# Altium PCB Galileo_Control_Board.PcbDoc
Units mm, origin at the board's own origin, x right, y up, seen from the top; angles counter-clockwise.
Board outline 46.6 x 40.8 mm, 2 copper layers (Top Layer, Bottom Layer); 51 components, 53 nets, 192 pads, 32 vias.
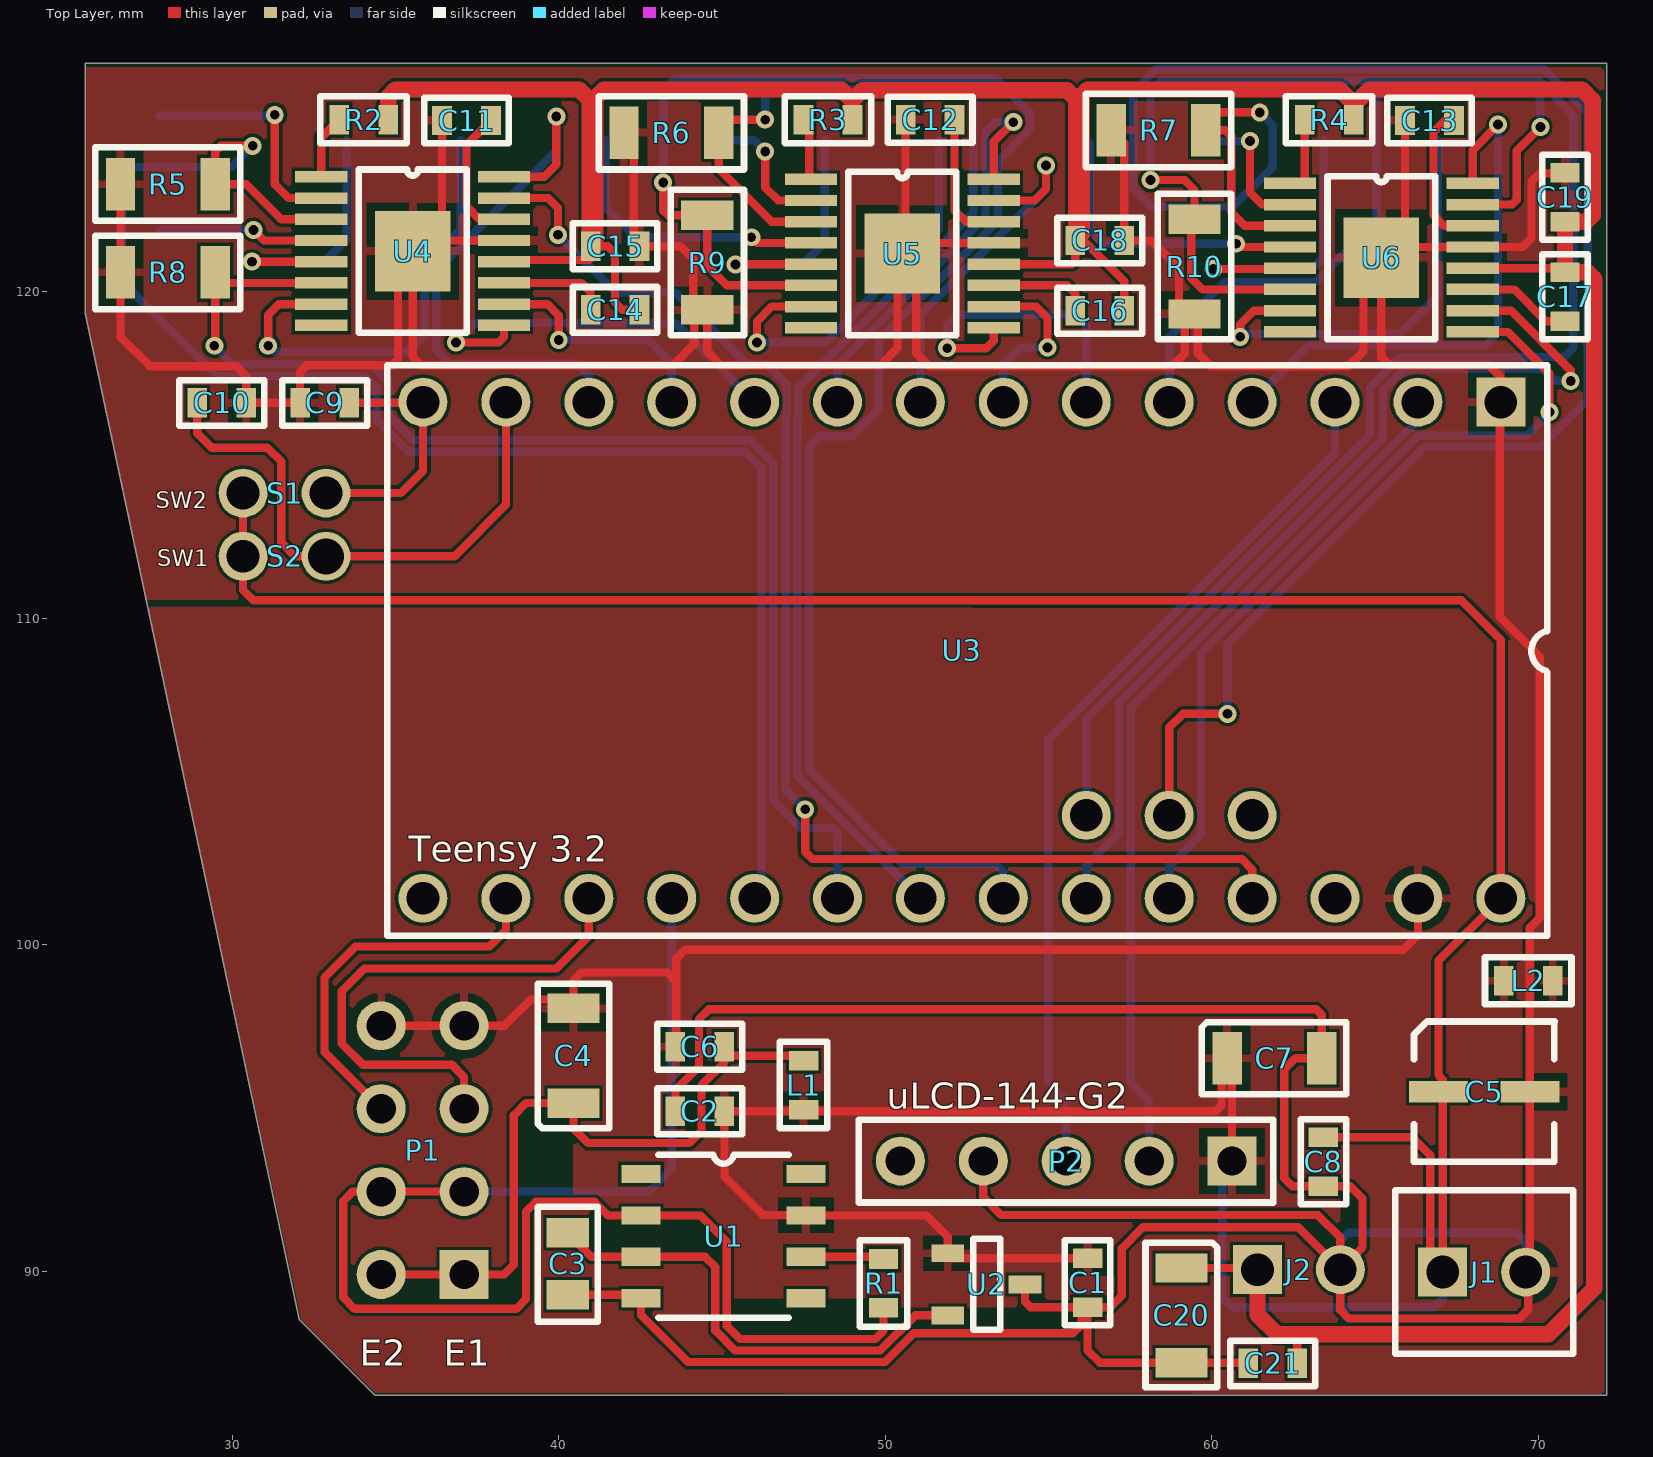
[diagram p0: Top Layer view]
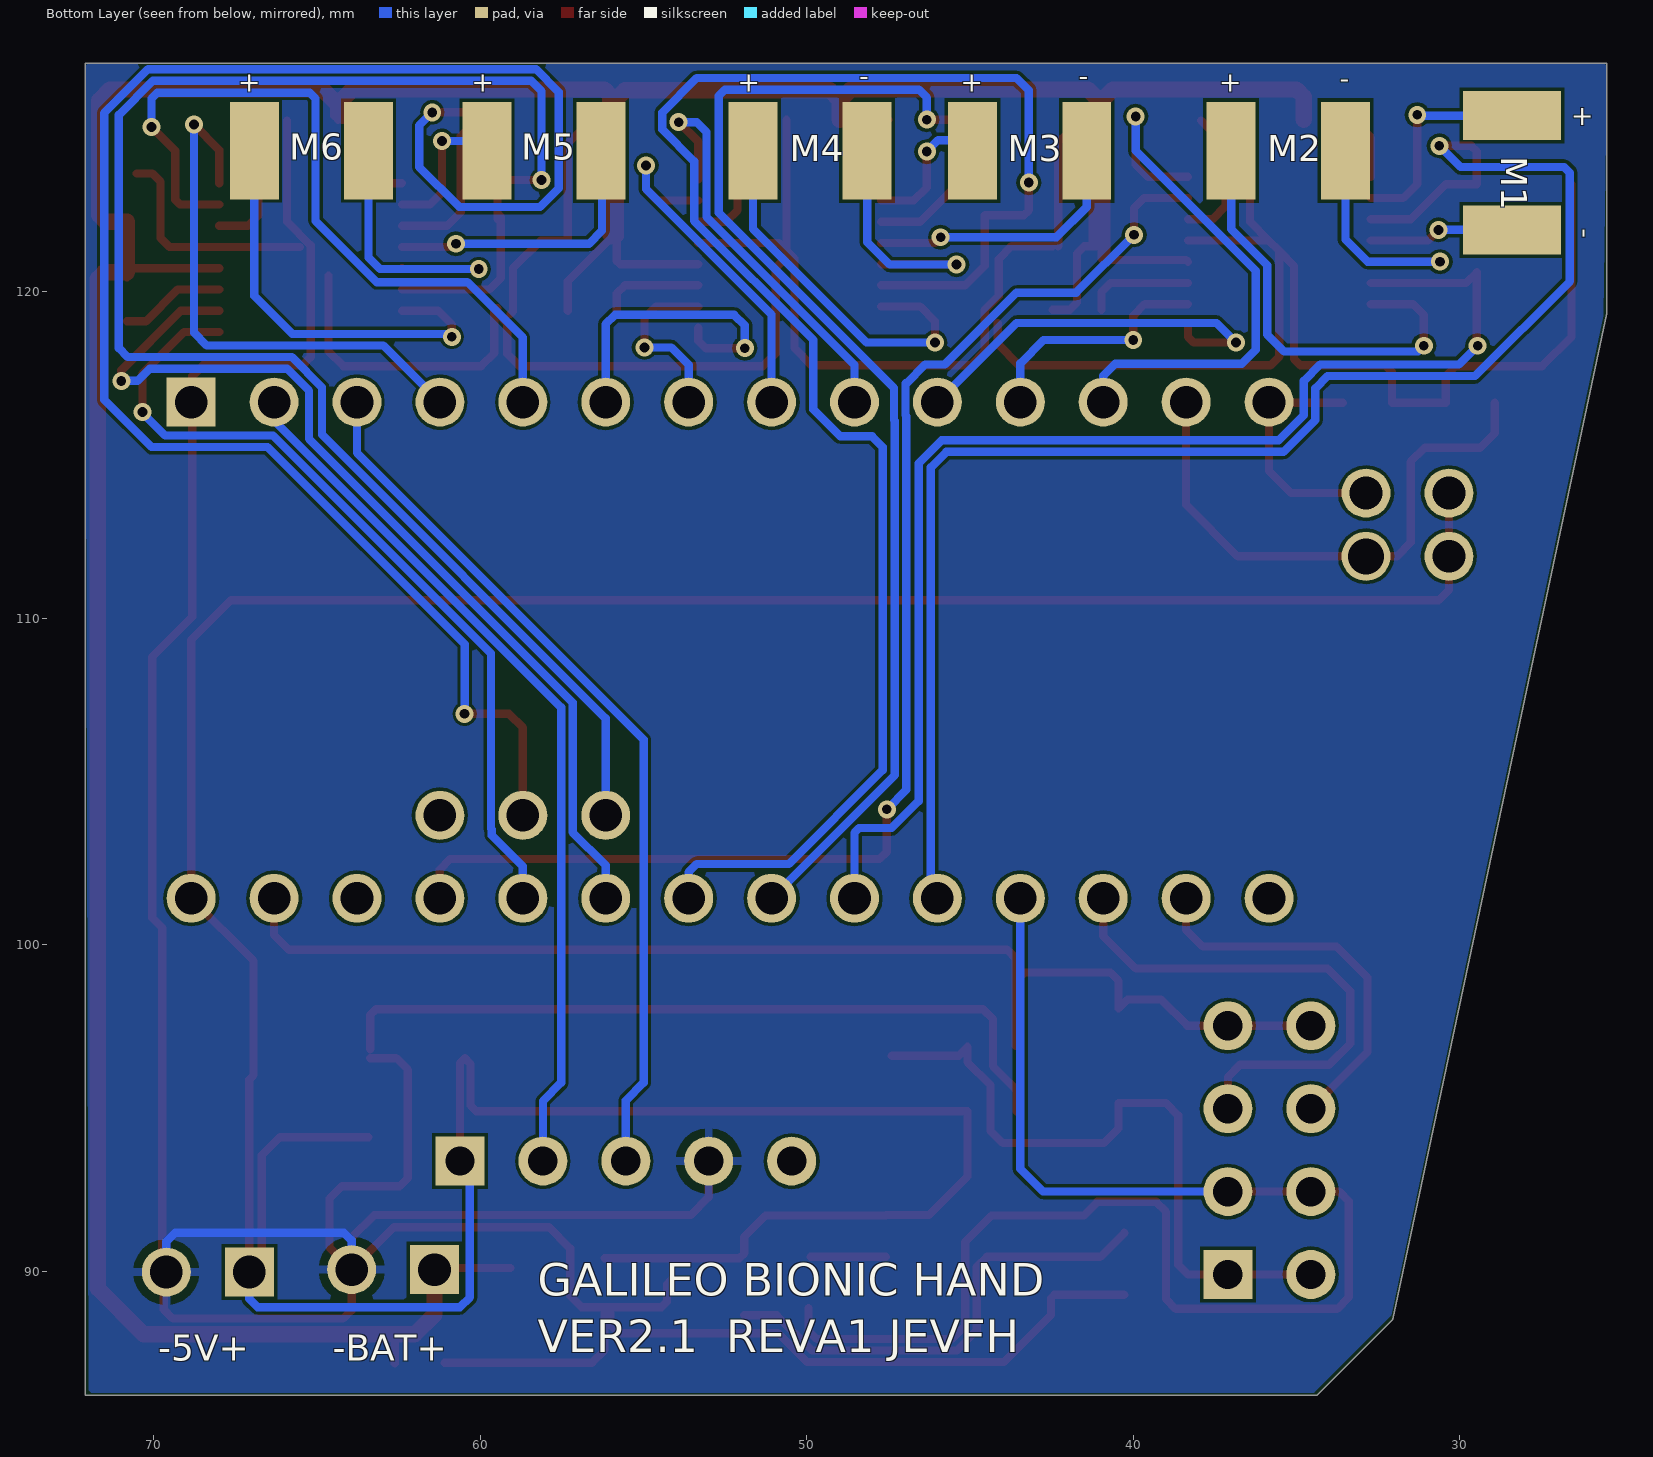
[diagram p1: Bottom Layer view, seen from below]

## Layer stack, top to bottom
Top Solder: solder mask 0.0102, Solder Resist, Dk 3.5
Top Layer: signal copper 0.0356
Dielectric 1: dielectric 0.32, FR-4, Dk 4.8
Bottom Layer: signal copper 0.0356
Bottom Solder: solder mask 0.0102, Solder Resist, Dk 3.5

## Board outline
32.05,88.52 25.5,119.34 25.5,127 72.1,127 72.1,86.2 34.37,86.2

## Design rules (kind name [scope] priority, off if disabled: settings)
Clearance [All] p1: gap=0.1
ComponentClearance [All] p1: gap=0.2 collisioncheckmode=3 verticalgap=0.254 showdistances=FALSE
HoleSize [All] p1: absolutevalues=TRUE maxlimit=2.54 minlimit=0.02 maxpercent=80.000 minpercent=20.000
HoleToHoleClearance [All] p1: gap=0.1 allowstackedmicrovias=TRUE
MinimumSolderMaskSliver [All] p1: minsoldermaskwidth=0.1
PolygonConnect [All] p1: connectstyle=Relief reliefconductorwidth=0.254 reliefentries=4 polygonreliefangle="90 Angle" airgapwidth=0.254
RoutingVias [All] p1: holewidth=0.711 width=1.27 viastyle="Through Hole" minholewidth=0.711 minwidth=1.27 maxholewidth=0.711 maxwidth=1.27
SilkToSilkClearance [All] p1: silktosilkclearance=0.1
SilkToSolderMaskClearance [IsPad] p1: minsilkscreentomaskgap=0.1 clearancetoexposedcopper=TRUE
SolderMaskExpansion [All] p1: expansion=0.1
Width [All] p1: maxlimit=0.7 minlimit=0.254 preferedwidth=0.254
24 further rules are at their usual default settings.

## Classes and differential pairs
component class Galileo_Control_Board: C1 C2 C3 C4 C5 C6 C7 C8 C9 C10 C11 C12 C13 C14 C15 C16 C17 C18 C19 J1 J2 L1 L2 P1 P2 R1 R2 R3 R4 R5 R6 R7 R8 R9 R10 S1 S2 U1 U2 U4 U5 U6

## Components (designator, comment, footprint, x,y, rotation, side; value= is the part's Value field where it differs from the comment)
C1 "100nF" C0603 56.2,89.65 r90 top
C2 "1uF" C0603 44.325,94.9 r0 top
C3 "10nF" C0805 40.275,90.225 r90 top
C4 "10uF, T" C1206 40.45,96.6 r90 top
C5 "10uF" CSVB 68.35,95.5 r0 top
C6 "100nF" C0603 44.325,96.875 r0 top
C7 "10uF, T" C1206 61.925,96.525 r0 top
C8 "100nF" C0603 63.425,93.35 r90 top
C9 "1uF" C0603 32.827,116.6 r0 top
C10 "1uF" C0603 29.675,116.6 r180 top
C11 "2.2uF" C0603 37.175,125.25 r180 top
C12 "2.2uF" C0603 51.375,125.275 r180 top
C13 "2.2uF" C0603 66.675,125.25 r180 top
C14 "10nF" C0603 41.725,119.45 r0 top
C15 "10uF" C0603 41.725,121.4 r180 top
C16 "10nF" C0603 56.575,119.425 r0 top
C17 "10nF" C0603 70.825,119.85 r90 top
C18 "10uF" C0603 56.575,121.575 r180 top
C19 "10uF" C0603 70.825,122.9 r270 top
C20 "10uF, T" C1206 59.075,88.65 r270 top
C21 "100nF" C0603 61.875,87.175 r0 top
J1 "TERMINAL BLOCK  2POS 3.5MM" 2POS3.5MM 68.35,89.975 r0 top
J2 "TERMINAL BLOCK  2POS 3.5MM" 2POS3.5MM 62.675,90.05 r0 top
L1 "EMI FILTER BED" R0603 47.5,95.7 r90 top
L2 "EMI FILTER BED" R0603 69.7,98.9 r180 top
M1 "Motor Pads*" MOTOR_PAD 28.4,123.65 r270 bottom
M2 "Motor Pads*" MOTOR_PAD 35.25,124.325 r180 bottom
M3 "Motor Pads*" MOTOR_PAD 43.175,124.325 r180 bottom
M4 "Motor Pads*" MOTOR_PAD 49.9,124.325 r180 bottom
M5 "Motor Pads*" MOTOR_PAD 58.05,124.325 r180 bottom
M6 "Motor Pads*" MOTOR_PAD 65.175,124.325 r180 bottom
P1 "Header 4X2A" HDR2X4_CEN 37.1,89.9 r90 top
P2 "Header 5" HDR1X5 60.625,93.375 r180 top
R1 "100" R0603 49.95,89.625 r90 top
R2 "47k" R0603 34.025,125.275 r0 top
R3 "47k" R0603 48.248,125.275 r0 top
R4 "47k" R0603 63.6,125.275 r0 top
R5 "0.2" R1206 28.025,123.3 r0 top
R6 "0.2" R1206 43.45,124.875 r0 top
R7 "0.2" R1206 58.375,124.95 r0 top
R8 "0.2" R1206 28.025,120.6 r0 top
R9 "0.2" R1206 44.55,120.9 r90 top
R10 "0.2" R1206 59.475,120.775 r90 top
S1 "PB" SW#1 31.6,113.838 r180 top
S2 "PB" SW#2 31.6,111.9 r180 top
U1 "OPA335AIDR" SO-8 45.05,91.075 r0 top
U2 "REF3112AIDBZR" SOT-23 53.1,89.6 r180 top
U3 "Teensy 3.2 - NXP Cortex-M4F" DIP28 52.35,109.025 r270 top
U4 "DRV8833CPWPR" SOP16 35.525,121.25 r0 top
U5 "DRV8833CPWPR" SOP16 50.525,121.175 r0 top
U6 "DRV8833CPWPR" SOP16 65.2,121.05 r0 top

## Footprints (in the part's own frame and the unit in brackets; to place one, negate y for a bottom-side part, rotate by r counter-clockwise, add the part's x,y. Pads: shape width x height; smd on the part's side, far side on the other; paste and mask are expansions set on the pad)
2POS3.5MM [mm]
  rect 1.5x1.5 hole 1: 1(-1.27,0)
  round 1.5 hole 1: 2(1.27,0)
  silkscreen extent -2.72,-2.5 2.72,2.5
C0603 [mm]
  rect 0.6x0.9 smd: 1(-0.75,0) 2(0.75,0)
  silkscreen extent -1.3,-0.7 1.3,0.7
C0805 [mm]
  rect 0.9x1.3 smd: 1(-0.95,0) 2(0.95,0)
  silkscreen extent -1.78,-0.93 1.75,0.93
C1206 [mm]
  rect 0.9x1.6 smd: 1(-1.45,0) 2(1.45,0)
  silkscreen extent -2.22,-1.1 2.2,1.1
CSVB [mm]
  rect 1.8x0.65 smd: 1(-1.4,0) 2(1.4,0)
  silkscreen extent -2.15,-2.15 2.16,2.15
DIP28 [mm]
  rect 1.5x1.5 hole 1 mask+0.1: 1(-7.6,16.51)
  round 1.5 hole 1 mask+0.1: 2(-7.6,13.97) 3(-7.6,11.43) 4(-7.6,8.89) 5(-7.6,6.35) 6(-7.6,3.81) 7(-7.6,1.27) 8(-7.6,-1.27) 9(-7.6,-3.81) 10(-7.6,-6.35) 11(-7.6,-8.89) 12(-7.6,-11.43) 13(-7.6,-13.97) 14(-7.6,-16.51) 15(7.6,-16.51) 16(7.6,-13.97) 17(7.6,-11.43) 18(7.6,-8.89) 19(7.6,-6.35) 20(7.6,-3.81) 21(7.6,-1.27) 22(7.6,1.27) 23(7.6,3.81) 24(7.6,6.35) 25(7.6,8.89) 26(7.6,11.43) 27(7.6,13.97) 28(7.6,16.51) 29(5.06,3.81) 30(5.06,6.35) 31(5.06,8.89)
  silkscreen extent -8.72,-17.6 8.75,17.93
HDR1X5 [mm] "Connector; Header; 5 Position"
  rect 1.5x1.5 hole 0.9: 1(0,0)
  round 1.5 hole 0.9: 2(2.54,0) 3(5.08,0) 4(7.62,0) 5(10.16,0)
  silkscreen extent -1.27,-1.27 11.43,1.27
HDR2X4_CEN [mm] "Connector; Header; 4x2 Position"
  rect 1.5x1.5 hole 0.9: 1(0,0)
  round 1.5 hole 0.9: 2(2.54,0) 3(5.08,0) 4(7.62,0) 5(0,2.54) 6(2.54,2.54) 7(5.08,2.54) 8(7.62,2.54)
MOTOR_PAD [mm]
  rect 1.5x3 smd: 1(-1.75,0) 2(1.75,0)
R0603 [mm]
  rect 0.6x0.9 smd: 1(-0.75,0) 2(0.75,0)
  silkscreen extent -1.33,-0.72 1.33,0.72
R1206 [mm]
  rect 0.9x1.6 smd: 1(-1.45,0) 2(1.45,0)
  silkscreen extent -2.22,-1.12 2.22,1.12, body extent -1.6,-0.8 1.6,0.8, height 0.64
SO-8 [mm]
  rect 1.194x0.559 smd: 1(-2.527,1.905) 2(-2.527,0.635) 3(-2.527,-0.635) 4(-2.527,-1.905) 5(2.527,-1.905) 6(2.527,-0.635) 7(2.527,0.635) 8(2.527,1.905)
  silkscreen extent -2,-2.5 2,2.5
SOP16 [mm]
  rect 1.6x0.35 smd mask+0.075: 1(-2.8,2.275) 2(-2.8,1.625) 3(-2.8,0.975) 4(-2.8,0.325) 5(-2.8,-0.325) 6(-2.8,-0.975) 7(-2.8,-1.625) 8(-2.8,-2.275) 9(2.8,-2.275) 10(2.8,-1.625) 11(2.8,-0.975) 12(2.8,-0.325) 13(2.8,0.325) 14(2.8,0.975) 15(2.8,1.625) 16(2.8,2.275)
  rect 2.31x2.46 smd: 17(0,0)
  silkscreen extent -1.65,-2.5 1.65,2.5
SOT-23 [mm]
  rect 1x0.55 smd mask+0.07: 1(1.185,-0.95) 2(1.185,0.95) 3(-1.185,0)
  silkscreen extent -0.43,-1.4 0.4,1.4
SW#1 [mm]
  round 1.5 hole 1: 1(-1.27,0) 2(1.27,0)
SW#2 [mm]
  round 1.5 hole 1.1: 1(-1.27,0)
  round 1.5 hole 1: 2(1.27,0)

## Part data
C1 C6 C8 C21: library part GRM188R71E104KA01D, "CAP CER 0.1UF 25V X7R 0603"
C2 C9 C10: library part GRM188R61E105KA12D, "CAP CER 1UF 25V X5R 0603"
C3: library part GRM216R71H103KA01D, "CAP CER 10000PF 50V X7R 0805"
C4 C7 C20: library part T491C106K020AT, "CAP TANT 10UF 20V 10% 2413"
C5: library part EEE-1EA100WR, "CAP ALUM 10UF 20% 25V SMD"
C11 C12 C13: library part 06036D225KAT2A, "CAP CER 2.2UF 6.3V X5R 0603"
C14 C16 C17: library part C0603C103K4RACTU, "CAP CER 10000PF 16V X7R 0603"
C15 C18 C19: library part GRT188R61E106ME13D, "CAP CER 10UF 25V X5R 0603"
J1 J2: library part 0393570002, "CONN TERMINAL BLOCK 2POS 3.5MM"
L1 L2: library part BLM18PG471SN1D, "FERRITE BEAD 470 OHM 0603"
M1 M2 M3 M4 M5 M6: library part Motor_PADs
P1: "Header, 4-Pin, Dual row"
P2: "Header, 5-Pin"
R1: library part ERJ-3EKF1000V, "RES SMD 100 OHM 1% 1/10W 0603"
R2 R3 R4: library part ERJ-3EKF4702V, "RES SMD 47K OHM 1% 1/10W 0603"
R5 R6 R7 R8 R9 R10: library part ERJ-8BSJR20V, "RES SMD 0.2 OHM 5% 1/2W 1206"
S1 S2: library part "D6C90 F1 LFS", "SWITCH PUSH SPST-NO 0.1A 32V"
U1: "IC OPAMP CHOPPER 2MHZ RRO 8SOIC"
U2: "IC VREF SERIES 1.25V SOT23-3"
U3: library part Teensy
U4 U5 U6: "IC MOTOR DRIVER PAR"

## Via types
v1: diameter 0.55, hole 0.3, Top Layer to Bottom Layer, 32 vias

## Nets (pads, with @x,y where several pads share a name; then routed paths per layer and width w, separated by ;. In a path a pad name is that pad's centre, name@x,y a point inside that pad or via, vN(x,y) a via of type N, cw(c..) or ccw(c..) an arc to the next point about the centre after c; other vN are vias at no path point)
+5V/ANA: C4.1 C6.2 L1.2 P1.1 P1.5 | length 21.1
  Top Layer w0.254: P1.5 P1.1 38.325,89.9 38.625,90.2 38.625,94.775 39,95.15 C4.1 40.45,94.375 40.9,93.925 44,93.925 44.375,94.3 44.375,95.7 45.075,96.4 C6.2 45.35,96.6 L1.2@47.4,96.6
+5V/DIG: C1.2 C2.2 C5.1 C7.1 C8.2 J1.1 L1.1 P2.1 S1.2 S2.2 U1.7 U2.1 U3.28 | length 116.2
  Top Layer w0.254: S1.2 S2.2 30.33,110.87 30.65,110.55 67.65,110.55 68.862,109.338 68.862,101.425 66.95,99.513 66.95,96 67.08,95.87 J1.1 66.7,90.355 66.7,93.55 66.15,94.1 C8.2 ; C1.2 52.065,90.4 U2.1 51.915,91.06 51.265,91.71 U1.7 47.562,91.725 46.25,91.725 45.075,92.9 C2.2 60.125,94.9 60.3,95.075 60.3,96.35 C7.1 60.625,96.375 P2.1
  Bottom Layer w0.254: P2.1 60.325,93.075 60.325,89.2 60.625,88.9 66.825,88.9 67.08,89.155 J1.1
+VBAT: C14.2 C15.2 C16.2 C17.2 C18.2 C19.2 C20.1 C21.2 J2.1 R2.2 R3.2 R4.2 U4.12 U5.12 U6.12 | length 127.7
  Top Layer w0.254: U4.12 38.375,120.975 C15.2@40.925,120.975 ; 40.825,126 40.825,121.075 C15.2@40.925,120.975 ; C15.2@41.125,121.55 C15.2 ; C14.2 41.95,119.45 41.725,119.675 41.725,121.175 41.5,121.4 C15.2 ; U5.12 55.725,120.85 55.825,120.95 C18.2 ; C18.2@55.725,121.675 55.725,126.025 ; C18.2@56.025,121.775 C18.2 ; C16.2 57.325,120.325 56.075,121.575 C18.2 ; C20.1 J2.1@61.355,90.1 ; 62.575,88.069 62.625,88.019 C21.2 ; R4.2@64.225,125.275 64.225,125.9 ; R4.2@64.35,125.425 R4.2 64.475,125.4 64.475,125.85 ; U6.12 C17.2@70.7,120.725 ; C17.2@70.825,120.45 C17.2 ; C15.2@40.925,120.975 40.975,121.025 C15.2
  Top Layer w0.5: R2.2 34.775,125.975 35,126.2 40.625,126.2 40.825,126 ; C15.2@41.125,121.55 41.125,125.95 41.375,126.2 48.65,126.2 48.998,125.852 R3.2 48.998,125.873 49.3,126.175 55.575,126.175 55.725,126.025 ; C18.2@56.025,121.775 56.025,126.025 56.2,126.2 63.925,126.2 64.225,125.9 ; J2.1 61.405,88.67 62.006,88.069 62.575,88.069 70.319,88.069 71.725,89.475 71.725,120.4 71.525,120.6 C17.2 ; 64.475,125.85 64.825,126.2 71.35,126.2 71.675,125.875 71.675,122.35 71.475,122.15 C19.2 C17.2@70.825,120.725
AGND: C4.2 C6.1 L2.2 P1.4 P1.8 U3.27 | length 37.4
  Top Layer w0.254: P1.8 P1.4 38.345,97.52 39.15,98.325 40.175,98.325 C4.2 40.45,98.9 40.7,99.15 43.325,99.15 43.6,98.875 ; C6.1@43.6,96.9 43.6,98.875 ; U3.27@66.322,101.425 66.322,100.297 65.875,99.85 43.875,99.85 43.6,99.575 43.6,98.875
E1: P1.3 U3.17 | length 16.2
  Top Layer w0.254: P1.3 37.1,95.95 36.725,96.325 34,96.325 33.35,96.975 33.35,98.575 34.05,99.275 39.925,99.275 40.922,100.272 U3.17@40.922,101.425
E2: P1.7 U3.16 | length 11.9
  Top Layer w0.254: P1.7 32.825,96.715 32.825,99 33.775,99.95 37.875,99.95 38.382,100.457 U3.16@38.382,101.425
GND: C1.1 C2.1 C3.1 C5.2 C7.2 C8.1 C9.1 C10.1 C11.2 C12.2 C13.2 C15.1 C18.1 C19.1 C20.2 C21.1 J1.2 J2.2 L2.1 P2.4 R5.1 R6.1 R7.1 R8.1 R9.1 R10.1 U1.4 U2.3 U3.1 U4.13 U4.17 U5.13 U5.17 U6.13 U6.17 | length 239.3
  Top Layer w0.254: R5.1 26.575,118.625 27.475,117.725 30.125,117.725 30.425,117.425 C10.1 C9.1 32.077,117.552 32.275,117.75 34.875,117.75 35.075,117.95 35.075,120.8 U4.17 ; C11.2 36.425,122.15 U4.17@35.85,121.575 ; U4.13 U4.17@35.85,121.575 ; C3.1 U1.4@42.418,89.275 ; R6.1 42.3,124.575 C15.1@42.3,121.4 ; C15.1 43.725,121.4 44.125,121 44.125,119.875 R9.1 44.55,118.175 44.975,117.75 49.85,117.75 50.375,118.275 50.375,121.025 U5.17 ; U1.4 42.523,88.652 43.958,87.217 49.993,87.217 50.876,88.1 55.75,88.1 56.025,88.375 56.025,88.725 C1.1 ; C2.1 43.575,95.55 44.3,96.275 44.3,97.725 44.6,98.025 63.198,98.025 63.375,97.848 C7.2@63.375,96.8 ; R9.1@44.15,119.05 44.15,118.4 43.5,117.75 35.8,117.75 35.525,118.025 U4.17 ; C12.2 U5.17@50.625,121.275 ; P2.4 53.005,92.27 53.55,91.725 63.25,91.725 63.945,91.03 J2.2 ; U5.13 50.85,121.5 U5.17@50.625,121.275 ; U2.3@54.16,89.725 U2.3 54.285,89.065 54.45,88.9 C1.1 ; R7.1 57.325,124.55 C18.1 58.15,121.575 59,120.725 59,119.4 R10.1@59.075,119.325 ; R10.1@59.475,119.5 59.575,119.4 59.575,118.125 59.975,117.725 64.2,117.725 64.65,118.175 U6.17@64.65,120.5 ; R10.1@59.55,119.4 59.175,119.025 59.175,118.1 58.8,117.725 51.35,117.725 50.95,118.125 50.95,120.75 U5.17 ; C21.1@61.1,87.2 C20.2 56.575,87.2 56.2,87.575 C1.1 ; C7.2 62.575,96.525 62.225,96.175 62.225,92.85 62.475,92.6 C8.1 64.25,92.6 64.625,92.225 64.625,90.73 J2.2 ; J2.2@63.81,89.885 J2.2@63.81,90.05 ; U6.17@65.525,121.375 69.525,121.375 69.8,121.65 69.8,123.375 70.05,123.625 C19.1@70.525,123.625 ; C13.2 65.925,122.15 65.2,121.425 65.2,118 65.45,117.75 68.5,117.75 68.825,117.425 68.825,110.05 70.05,108.825 70.05,100.825 69.75,100.525 C5.2 69.75,90.105 J1.2 69.7,89.895 69.7,88.825 69.425,88.55 64.2,88.55 63.945,88.805 J2.2 ; U4.17 U4.17@35.85,121.575 ; U5.17 U5.17@50.625,121.275 ; C1.1 56.9,88.9 57.25,89.25 57.25,90.7 57.9,91.35 62.645,91.35 J2.2
  Bottom Layer w0.254: J2.2 63.945,90.945 64.175,91.175 69.35,91.175 69.62,90.905 J1.2
IM1: R5.2 U3.19 U4.3 | length 49.4
  Top Layer w0.254: v1(30.625,124.475) 29.65,124.475 29.475,124.3 R5.2 30.425,123.3 31.5,122.225 U4.3
  Bottom Layer w0.254: v1(30.625,124.475) 29.975,123.825 26.8,123.825 26.625,123.65 26.625,120.325 29.529,117.421 34.048,117.421 34.421,117.048 34.421,116.078 35.399,115.1 45.725,115.1 46.2,114.625 46.2,101.623 U3.19@46.002,101.425
IM2: R8.2 U3.20 U4.6 | length 39.6
  Top Layer w0.254: v1(29.45,118.35) 29.475,118.375 R8.2 29.8,120.275 U4.6
  Bottom Layer w0.254: v1(29.45,118.35) 30.025,117.775 34.275,117.775 34.775,117.275 34.775,116.225 35.546,115.454 45.872,115.454 46.575,114.751 46.575,104.4 47.4,103.575 48.4,103.575 48.542,103.433 U3.20@48.542,101.425
IM3: R6.2 U3.21 U5.3 | length 41.8
  Top Layer w0.254: v1(46.325,125.275) 45.3,125.275 R6.2 44.9,123.775 46.525,122.15 U5.3
  Bottom Layer w0.254: v1(46.325,125.275) 46.325,125.95 46.571,126.196 52.504,126.196 52.7,126 52.7,122.427 47.331,117.058 47.331,116.074 47.304,116.047 47.304,105.203 U3.21@51.082,101.425
IM4: R9.2 U3.22 U5.6 | length 53.4
  Top Layer w0.254: v1(43.2,123.35) 43.2,122.5 43.35,122.35 R9.2 44.55,120.8 45.15,120.2 U5.6
  Bottom Layer w0.254: v1(43.2,123.35) 43.2,126.175 43.575,126.55 53.375,126.55 54.427,125.498 54.427,124.977 53.45,124 53.45,122.176 49.8,118.526 49.8,116.4 48.975,115.575 48,115.575 47.675,115.25 47.675,105.35 50.55,102.475 53.373,102.475 53.622,102.226 U3.22@53.622,101.425
IM5: R7.2 U3.30 U6.3 | length 61.7
  Top Layer w0.254: U3.30@58.702,103.965 58.702,106.652 59.125,107.075 v1(60.482,107.075) ; v1(61.475,125.5) 59.75,125.5 59.825,125.425 R7.2 60.425,124.95 60.6,124.775 60.6,122.45 61.025,122.025 U6.3
  Bottom Layer w0.254: v1(60.482,107.075) 60.482,109.207 66.521,115.246 70.073,115.246 71.525,116.698 71.525,125.476 70.176,126.825 58.299,126.825 57.6,126.126 57.6,123.175 58.177,122.598 60.644,122.598 61.875,123.829 61.875,125.1 v1(61.475,125.5)
IM6: R10.2 U3.29 U6.6 | length 54.4
  Top Layer w0.254: v1(58.125,123.425) 59.175,123.425 59.475,123.125 R10.2@59.475,122.4 ; R10.2 R10.2@59.475,122.4 ; U6.6 59.725,120.075 59.375,120.425 59.375,122.3 R10.2@59.475,122.4
  Bottom Layer w0.254: U3.29@56.162,103.965 56.162,106.937 64.85,115.625 64.85,117.076 65.778,118.004 70.274,118.004 70.804,118.004 71.075,118.275 71.075,125.426 70.03,126.471 58.446,126.471 58.125,126.15 v1(58.125,123.425)
M1+: M1.1 U4.2 | length 7.3
  Top Layer w0.254: v1(31.3,125.425) 31.3,123.3 31.725,122.875 U4.2
  Bottom Layer w0.254: M1.1@27.775,125.4 M1.1 31.275,125.4 v1(31.3,125.425)
M1-: M1.2 U4.4 | length 5.1
  Top Layer w0.254: v1(30.65,121.9) 30.975,121.575 U4.4
  Bottom Layer w0.254: M1.2@27.775,121.9 M1.2 v1(30.65,121.9)
M2+: M2.1 U4.7 | length 14.2
  Top Layer w0.254: v1(31.1,118.35) 31.1,119.3 31.425,119.625 U4.7
  Bottom Layer w0.254: v1(31.1,118.35) 31.275,118.175 35.375,118.175 35.896,118.696 35.896,120.821 37,121.925 M2.1 M2.1@37,124.65
M2-: M2.2 U4.5 | length 8.4
  Top Layer w0.254: v1(30.6,120.925) U4.5
  Bottom Layer w0.254: v1(30.6,120.925) 32.825,120.925 33.5,121.6 M2.2 M2.2@33.5,124.65
M3+: M3.1 U5.2 | length 4.2
  Top Layer w0.254: v1(46.325,124.3) 46.325,123.2 46.725,122.8 U5.2
  Bottom Layer w0.254: M3.1@44.925,124.65 45.975,124.65 v1(46.325,124.3)
M3-: M3.2 U5.4 | length 8.8
  Top Layer w0.254: v1(45.9,121.675) 46.075,121.5 U5.4
  Bottom Layer w0.254: M3.2@41.425,124.65 M3.2 41.425,122.6 42.35,121.675 v1(45.9,121.675)
M4+: M4.1 U5.7 | length 12.2
  Top Layer w0.254: v1(46.075,118.45) 46.075,119.1 46.525,119.55 U5.7
  Bottom Layer w0.254: v1(46.075,118.45) 48.175,118.45 51.65,121.925 M4.1 M4.1@51.65,124.65
M4-: M4.2 U5.5 | length 8.5
  Top Layer w0.254: v1(45.412,120.838) 45.425,120.85 U5.5
  Bottom Layer w0.254: v1(45.412,120.838) 47.463,120.838 48.15,121.525 M4.2 M4.2@48.15,124.65
M5+: M5.1 U6.2 | length 4.5
  Top Layer w0.254: v1(61.175,124.625) 61.175,123.05 61.55,122.675 U6.2
  Bottom Layer w0.254: M5.1@59.65,124.625 v1(61.175,124.625)
M5-: M5.2 U6.4 | length 9
  Top Layer w0.254: v1(60.75,121.475) 60.85,121.375 U6.4
  Bottom Layer w0.254: M5.2@56.275,124.55 56.275,121.875 56.675,121.475 v1(60.75,121.475)
M6+: M6.1 U6.7 | length 13.4
  Top Layer w0.254: v1(60.875,118.625) 60.875,119 61.3,119.425 U6.7
  Bottom Layer w0.254: v1(60.875,118.625) 60.962,118.712 65.762,118.712 66.925,119.875 M6.1 M6.1@66.925,124.65
M6-: M6.2 U6.5 | length 9.5
  Top Layer w0.254: v1(60.05,120.7) 62.375,120.7 U6.5
  Bottom Layer w0.254: v1(60.05,120.7) 63.075,120.7 63.425,121.05 M6.2 M6.2@63.425,124.65
NetC3_2: C3.2 U1.3 U2.2 | length 14.7
  Top Layer w0.254: C3.2 41.01,90.44 U1.3 44.485,90.44 44.796,90.129 44.796,88.178 45.403,87.571 49.847,87.571 50.926,88.65 U2.2
NetC11_1: C11.1 U4.14 | length 4.3
  Top Layer w0.254: C11.1 37.175,124.5 37.175,122.625 37.575,122.225 U4.14
NetC12_1: C12.1 U5.14 | length 4.1
  Top Layer w0.254: C12.1 52.125,122.5 52.475,122.15 U5.14
NetC13_1: C13.1 U6.14 | length 4.7
  Top Layer w0.254: C13.1 67.15,125.25 66.8,124.9 66.8,122.35 67.125,122.025 U6.14
NetC14_1: C14.1 U4.11 | length 3.3
  Top Layer w0.254: U4.11 40.7,120.275 40.975,120 C14.1
NetC16_1: C16.1 U5.11 | length 3.1
  Top Layer w0.254: U5.11 55.575,120.2 55.825,119.95 C16.1
NetC17_1: C17.1 U6.11 | length 3.2
  Top Layer w0.254: U6.11 69.275,120.075 70.25,119.1 C17.1
NetR1_2: R1.2 U1.6 | length 2.3
  Top Layer w0.254: U1.6 R1.2@49.885,90.44
NetR2_1: R2.1 U4.1 | length 2
  Top Layer w0.254: U4.1 32.725,124.725 R2.1
NetR3_1: R3.1 U5.1 | length 1.9
  Top Layer w0.254: R3.1 47.675,125.098 47.675,123.5 U5.1
NetR4_1: R4.1 U6.1 | length 2.4
  Top Layer w0.254: U6.1 62.8,123.325 62.85,123.375 R4.1
PWM1+: U3.12 U4.16 | length 17.7
  Top Layer w0.254: U4.16 39.55,123.525 39.925,123.9 v1(39.925,125.375)
  Bottom Layer w0.254: v1(39.925,125.375) 39.925,124.325 36.25,120.65 36.25,118.225 36.675,117.8 40.55,117.8 40.922,117.428 U3.12@40.922,116.625
PWM1-: U3.25 U4.15 | length 40.9
  Top Layer w0.254: U4.15 39.675,122.875 39.975,122.575 v1(39.975,121.75) ; v1(47.55,104.15) 47.55,102.85 47.775,102.625 60.925,102.625 61.242,102.308 U3.25@61.242,101.425
  Bottom Layer w0.254: v1(39.975,121.75) 41.75,119.975 43.575,119.975 45.775,117.775 46.375,117.775 46.95,117.2 ; 46.977,117.2 46.977,116.22 46.95,116.193 46.95,104.75 v1(47.55,104.15)
PWM2+: U3.10 U4.9 | length 12.3
  Top Layer w0.254: v1(36.85,118.45) 38.15,118.45 38.325,118.625 U4.9
  Bottom Layer w0.254: v1(36.85,118.45) 37.45,119.05 43.577,119.05 U3.10@46.002,116.625
PWM2-: U3.11 U4.10 | length 7.5
  Top Layer w0.254: U4.10 39.65,119.625 40,119.275 v1(40,118.525)
  Bottom Layer w0.254: v1(40,118.525) 42.75,118.525 43.462,117.813 U3.11@43.462,116.625
PWM3+: U3.9 U5.16 | length 13.1
  Top Layer w0.254: U5.16 53.325,124.6 v1(53.925,125.2)
  Bottom Layer w0.254: U3.9@48.542,116.625 48.542,117.768 53.075,122.301 53.075,124.9 53.375,125.2 v1(53.925,125.2)
PWM3-: U3.8 U5.15 | length 11.3
  Top Layer w0.254: U5.15 54.575,122.8 54.925,123.15 v1(54.925,123.875)
  Bottom Layer w0.254: U3.8@51.082,116.625 51.082,119.307 54.925,123.15 v1(54.925,123.875)
PWM4+: U3.6 U5.9 | length 9.5
  Top Layer w0.254: v1(51.9,118.275) 53.1,118.275 53.325,118.5 U5.9
  Bottom Layer w0.254: v1(51.9,118.275) 51.9,118.975 52.225,119.3 55.875,119.3 56.162,119.013 U3.6@56.162,116.625
PWM4-: U3.7 U5.10 | length 5.4
  Top Layer w0.254: U5.10 54.625,119.55 54.975,119.2 v1(54.975,118.3)
  Bottom Layer w0.254: U3.7@53.622,116.625 53.622,117.772 54.15,118.3 v1(54.975,118.3)
PWM5+: U3.4 U6.16 | length 16.9
  Top Layer w0.254: U6.16 68,124.35 v1(68.775,125.125)
  Bottom Layer w0.254: U3.4@61.242,116.625 62.975,118.358 68.383,118.358 68.775,118.75 v1(68.775,125.125)
PWM5-: U3.5 U6.15 | length 23.5
  Top Layer w0.254: U6.15 69.2,122.675 69.35,122.825 69.35,124.325 v1(70.075,125.05)
  Bottom Layer w0.254: U3.5@58.702,116.625 58.702,118.602 60.4,120.3 63.176,120.3 65.05,122.174 65.05,125.925 65.225,126.1 69.9,126.1 70.075,125.925 v1(70.075,125.05)
PWM6+: U3.24 U6.9 | length 25.8
  Top Layer w0.254: U6.9 69.075,118.775 70.35,117.5 v1(70.35,116.325)
  Bottom Layer w0.254: U3.24@58.702,101.425 58.702,102.402 59.648,103.348 59.648,103.531 59.677,103.56 59.677,108.927 66.35,115.6 69.656,115.6 70.35,116.294 v1(70.35,116.325) v1@70.283,116.325
PWM6-: U3.23 U6.10 | length 29.6
  Top Layer w0.254: U6.10 69.175,119.425 71,117.6 v1(71,117.275)
  Bottom Layer w0.254: U3.23@56.162,101.425 56.162,102.437 57.171,103.446 57.171,107.422 65.25,115.501 65.25,116.975 65.925,117.65 70.127,117.65 70.502,117.275 v1(71,117.275)
REF: P1.2 P1.6 R1.1 U1.2 U3.18 | length 45.4
  Top Layer w0.254: P1.2 P1.6 33.69,92.44 33.4,92.15 33.4,89.2 33.75,88.85 38.7,88.85 39,89.15 39,91.825 39.3,92.125 41.1,92.125 41.515,91.71 U1.2 44.34,91.71 45.15,90.9 45.15,88.325 45.55,87.925 49.7,87.925 49.95,88.175 R1.1
  Bottom Layer w0.254: P1.2 42.765,92.44 43.462,93.137 U3.18@43.462,101.425
RX_LCD: P2.2 U3.2 | length 27.1
  Bottom Layer w0.254: P2.2 58.085,95.215 57.525,95.775 57.525,107.276 66.301,116.052 66.322,116.072 U3.2@66.322,116.625
SW1: C10.2 S2.1 U3.13 | length 17.2
  Top Layer w0.254: C10.2 28.925,115.675 29.375,115.225 31.075,115.225 31.5,114.8 31.5,112.325 31.925,111.9 S2.1 36.8,111.9 38.382,113.482 U3.13@38.382,116.625
SW2: C9.2 S1.1 U3.14 | length 7.6
  Top Layer w0.254: S1.1 35.163,113.838 35.842,114.517 35.842,116.625 35.817,116.6 C9.2
TX_LCD: P2.3 U3.3 | length 27.1
  Bottom Layer w0.254: P2.3 55.545,95.23 55,95.775 55,106.287 63.782,115.069 U3.3@63.782,116.625
pads on no net: P2.5 U1.1 U1.5 U1.8 U3.15 U3.26 U3.31 U4.8 U5.8 U6.8

## Polygon pours and split planes (outlines as drawn)
GND on Bottom Layer "GND" (solid, remove dead copper, pour order 40): 25.6,119.275 25.5,127 48.5,127 72.1,127 72,86.35 71.975,86.325 71.925,86.275 34.45,86.275 34.45,86.3 32.1,88.65
GND on Top Layer "GND" (solid, remove dead copper, pour order 48): 69.055,109.125 69.066,109.216 69.1,109.325 69.183,109.358 69.055,109.497 68.826,109.726 68.351,110.201 67.869,110.683 69.194,110.841 70.162,110.729 70.767,110.683 71.208,110.729 71.494,110.729 71.494,88.031 71.494,88.3 70.269,88.031 68.875,88.3 69.055,108.97 69.056,109.098
AGND on Top Layer "AGND" (solid, remove dead copper, pour order 44): 72.025,86.225 72.025,110.286 27.408,110.361 27.698,109 28.351,105.925 28.892,103.377 32.1,88.625 32.1,88.55 34.375,86.275
GND on Top Layer "GND" (solid, remove dead copper, pour order 46): 71.975,110.561 70.39,110.585 27.366,110.561 26.244,115.838 25.5,119.34 25.5,119.425 25.5,121.2 25.5,123.1 25.5,126.875 71.975,126.875 72.025,126.825
+5V/DIG on Top Layer "VCC" (solid, remove dead copper, pour order 54): 45.1,98.875 62.675,98.875 63.375,98.175 63.945,97.605 63.945,90.05 59.125,90.05 59.075,90.1 57.875,88.9 56.2,88.9 49.975,88.9 49.95,88.875 49.655,89.17 42.523,89.17 40.38,89.17 40.275,89.275 40.45,89.45 40.45,98.05 44.275,98.05 45.1,98.875

## Silkscreen, mask and mechanical layers (free items; w line width, h text height)
Top Overlay:
  text "SW2" at 27.65,113.375 h0.5
  text "SW1" at 27.7,111.6 h0.5
  text "Teensy 3.2" at 35.4,102.55 h0.8
  text "uLCD-144-G2" at 50.05,94.975 h0.8
  text "E2" at 33.9,87.1 h0.8
  text "E1" at 36.475,87.1 h0.8
Bottom Overlay:
  text "-" at 41.675,126.775 h0.6 r180
  text "-" at 48.4,126.775 h0.6 r180
  text "-" at 33.675,126.7 h0.6 r180
  text "+" at 36.675,126.125 h0.6
  text "+" at 44.6,126.125 h0.6
  text "+" at 51.425,126.125 h0.6
  text "+" at 59.575,126.125 h0.6
  text "+" at 66.725,126.125 h0.6
  text "+" at 25.9,125.1 h0.6
  text "-" at 26.425,121.65 h0.6 r90
  text "GALILEO BIONIC HAND" at 58.25,89.25 h1
  text "VER2.1  REVA1 JEVFH" at 58.25,87.525 h1
  text "-BAT+" at 64.525,87.25 h0.8
  text "-5V+" at 69.875,87.25 h0.8
Board Outline:
  the board outline again, w0.2